# Altium PCB esp8266_hat.PcbDoc
Units mil, origin at the board's own origin, x right, y up, seen from the top; angles counter-clockwise.
Board outline 1110 x 1560 mil, 2 copper layers (Top Layer, Bottom Layer); 11 components, 19 nets, 41 pads, 2 vias.
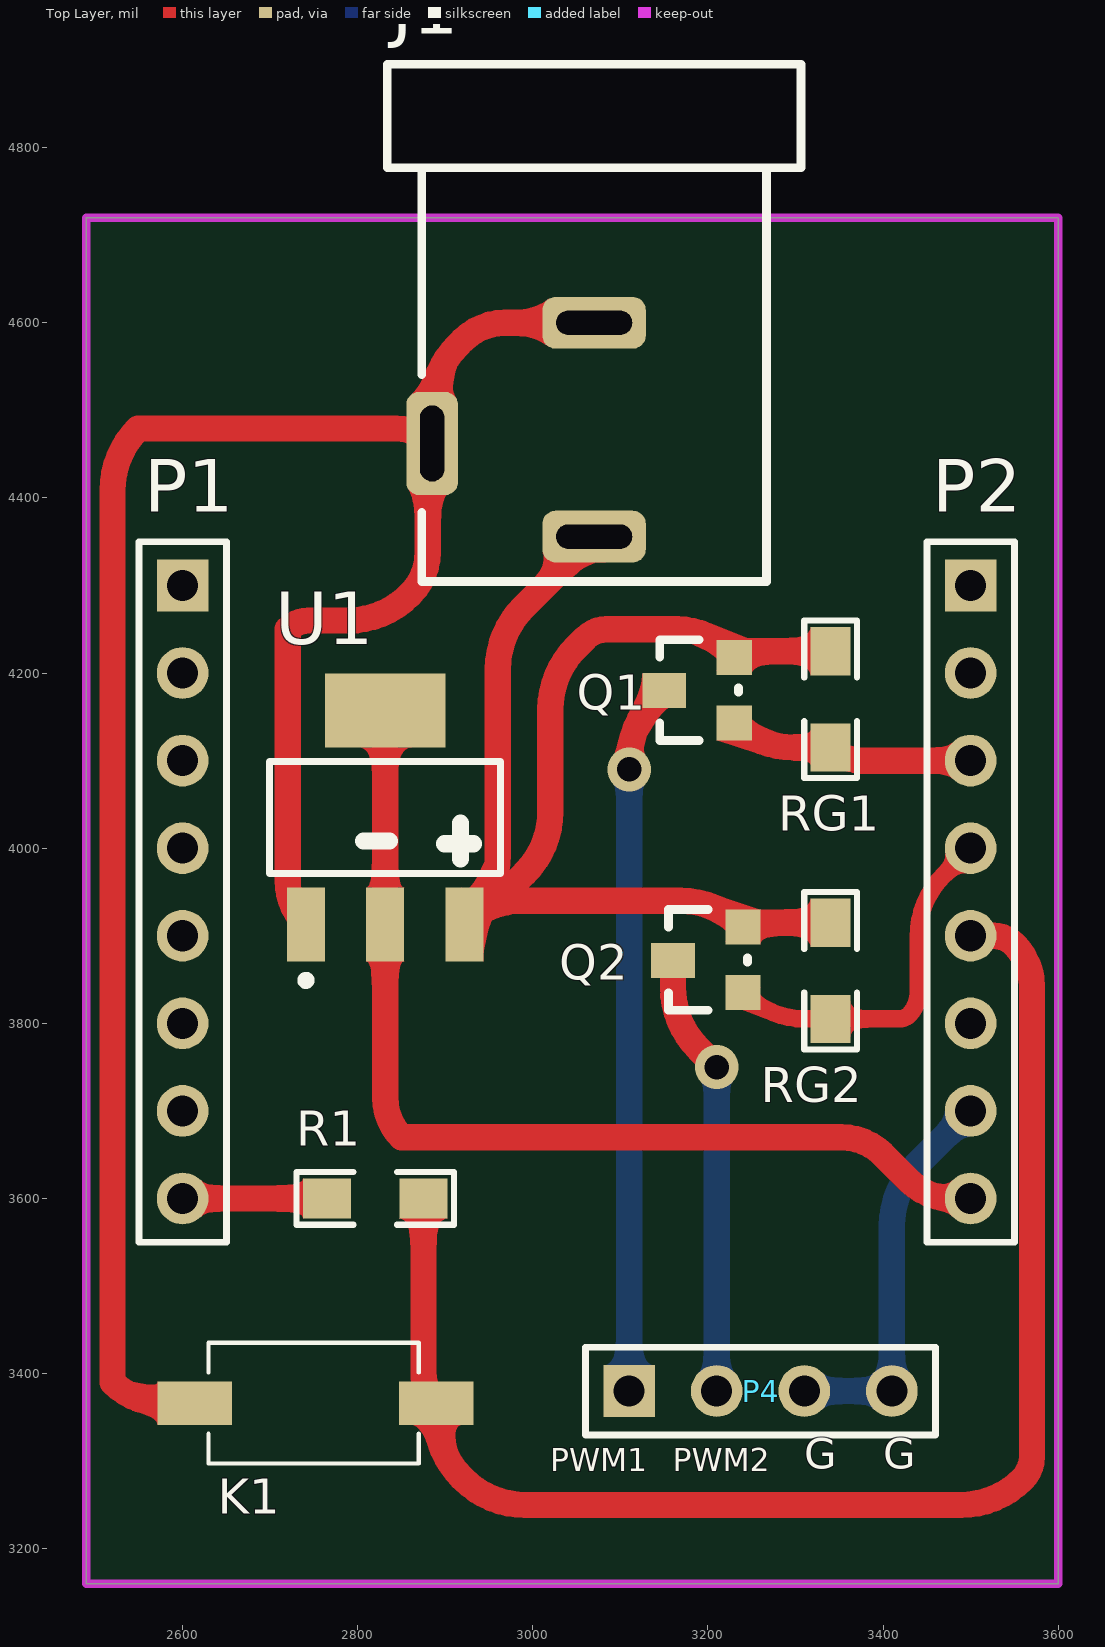
[diagram p0: Top Layer view]
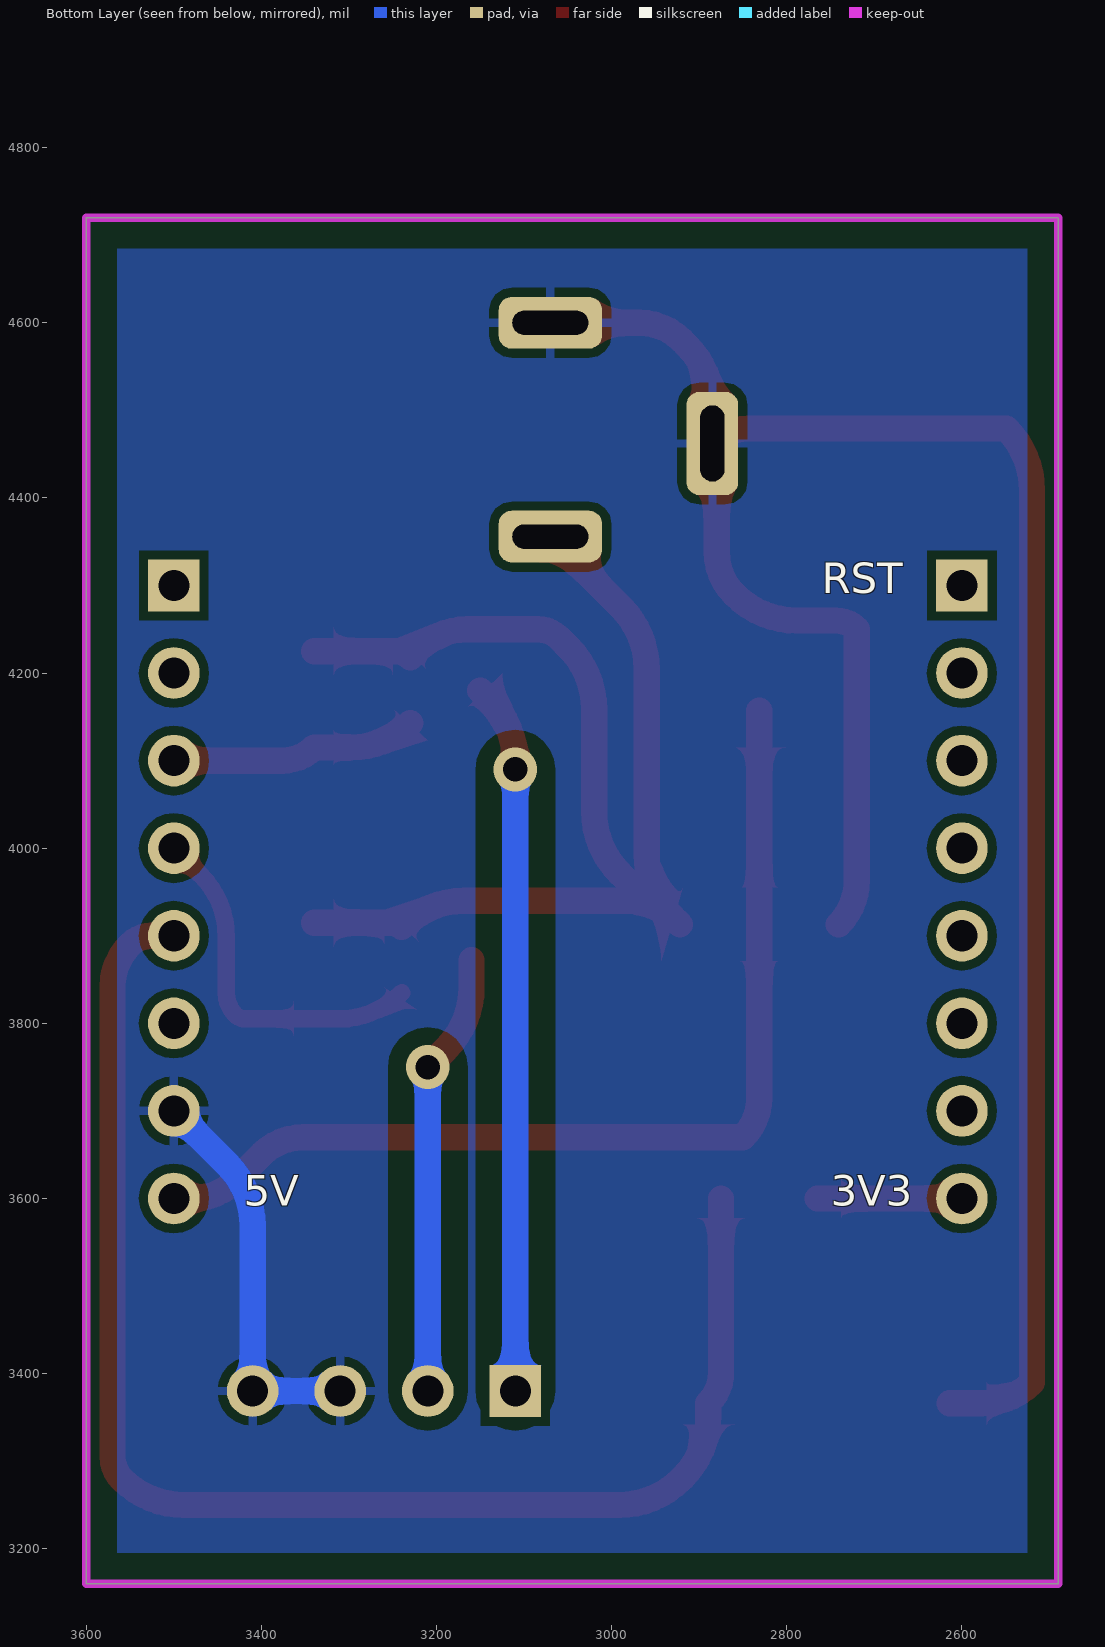
[diagram p1: Bottom Layer view, seen from below]
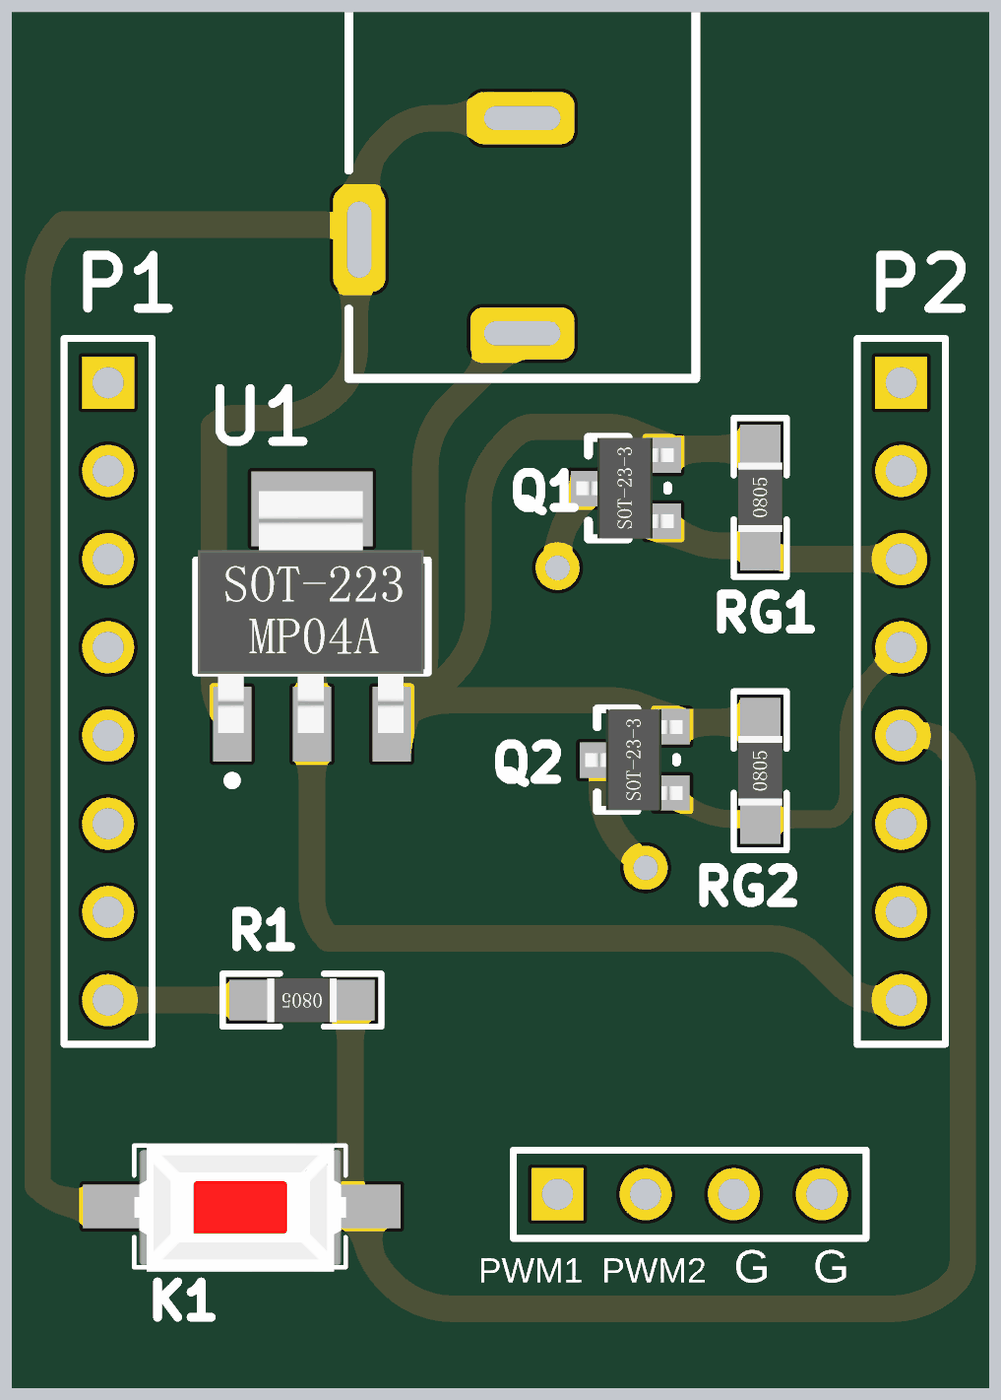
[diagram p2: 3D render of the assembled board from above, using the file's embedded part models]

## Layer stack, top to bottom
Top Solder: solder mask 0.4, Solder Resist, Dk 3.5
Top Layer: signal copper 1.4
Dielectric 1: dielectric 12.6, FR-4, Dk 4.8
Bottom Layer: signal copper 1.4
Bottom Solder: solder mask 0.4, Solder Resist, Dk 3.5

## Board outline
2490,3160 3600,3160 3600,4720 2490,4720

## Design rules (kind name [scope] priority, off if disabled: settings)
Clearance [All] p1: gap=10 except(30: Track-Poly)
PolygonConnect [All] p1: connectstyle=Relief reliefconductorwidth=10 reliefentries=4 polygonreliefangle="90 Angle" airgapwidth=10
RoutingVias [All] p1: holewidth=28 width=50 viastyle="Through Hole" minholewidth=28 minwidth=50 maxholewidth=28 maxwidth=50
SolderMaskExpansion [All] p1: expansion=4
Width [All] p1: maxlimit=100 minlimit=10 preferedwidth=30 minimp=50.000000 maximp=50.000000 favimp=50.000000
30 further rules are at their usual default settings.

## Components (designator, comment, footprint, x,y, rotation, side; value= is the part's Value field where it differs from the comment)
J1 "DC-12V" DC-Jack 3070,4895.28 r270 top
K1 "Button" KEY_2 2760,3350 r180 top
P1 "Header 8" HDR1X8 2600,4300 r270 top
P2 "Header 8" HDR1X8 3500,4300 r270 top
P4 "Header 4" HDR1X4 3110,3380 r0 top
Q1 "AO3401" SOT23 3230.63,4138.12 r90 top
Q2 "AO3401" SOT23 3240.63,3830.12 r90 top
R1 "10K" 0805_r 2820,3600 r180 top
RG1 "200K" 0805_r 3340,4170 r90 top
RG2 "200K" 0805_r 3340,3860 r90 top
U1 "AMS1117-12-5" SOT-223 2820,4040 r0 top

## Footprints (in the part's own frame and the unit in brackets; to place one, negate y for a bottom-side part, rotate by r counter-clockwise, add the part's x,y. Pads: shape width x height; smd on the part's side, far side on the other; paste and mask are expansions set on the pad)
0805_r [mil]
  rect 55.12x46 smd: 1(-55,0) 2(55,0)
  silkscreen extent -90,-30 90,30, body extent -39,-25 39,25, height 22
DC-Jack [mm] "5.5x2.1mm"
  rrect50% 1.5x3 hole 0.7 slot 2.2 at 90 deg unplated: 1(13.7,0) 2(7.5,0)
  rrect50% 3x1.5 hole 0.7 slot 2.2 at 0 deg unplated: 2(11,-4.7)
  silkscreen extent 0,-6 15,6
HDR1X4 [mm] "Connector; Header; 4 Position"
  rect 1.5x1.5 hole 0.9: 1(0,0)
  round 1.5 hole 0.9: 2(2.54,0) 3(5.08,0) 4(7.62,0)
  silkscreen extent -1.27,-1.27 8.89,1.27
HDR1X8 [mm] "Connector; Header; 8 Position"
  rect 1.5x1.5 hole 0.9: 1(0,0)
  round 1.5 hole 0.9: 2(2.54,0) 3(5.08,0) 4(7.62,0) 5(10.16,0) 6(12.7,0) 7(15.24,0) 8(17.78,0)
  silkscreen extent -1.27,-1.27 19.05,1.27
KEY_2 [mil] "贴片"
  rect 85x49.37 smd: 1(-129.57,-16.14) 2(146.02,-16.14)
  silkscreen extent -110,-85 130,53, body extent -110,-88 130,58
SOT23 [mil]
  rect 40x40 smd: 1(4.88,0.63) 3(79.88,0.63)
  rect 40x50 smd: 2(41.88,80.63)
  silkscreen extent -15,-4 100,86, body extent -15,-11 99,99, height 47
SOT-223 [mm] "ASM1117系列"
  rect 1.1x2.15 smd: 1(-2.012,-3.227) 2(0.288,-3.227) 3(2.588,-3.227)
  rect 3.5x2.15 smd: 2(0.288,2.973)
  silkscreen extent -3.06,-4.98 3.64,1.5, body extent -3,-3.48 3.5,3.48, height 1.7

## Part data
J1: library part DC-2.5x2.1-005, "DC-Jack-5.5x2.1mm"
K1: library part KEY_2, "Switch"
P1 P2: "Header, 8-Pin"
P4: "Header, 4-Pin"
Q1 Q2: "PMOS,30V,4A"
R1 RG1 RG2: library part RES, "Resistor"
U1: library part AMS1117, "3.3V电压转换器AMS1117"

## Via types
v1: diameter 50, hole 28, Top Layer to Bottom Layer, 2 vias

## Nets (pads, with @x,y where several pads share a name; then routed paths per layer and width w, separated by ;. In a path a pad name is that pad's centre, name@x,y a point inside that pad or via, vN(x,y) a via of type N, cw(c..) or ccw(c..) an arc to the next point about the centre after c; other vN are vias at no path point)
3V3: P1.8 R1.2 | length 165
  Top Layer w30: P1.8 R1.2
5V: P2.8 U1.2 | length 1165.2
  Top Layer w30: U1.2@2831.34,4157.05 2831.34,3912.95 2831.34,3715.05 ccw(c2895.05,3715.05) 2850,3670 3351.72,3670 cw(c3351.72,3601.72) 3400,3650 3430,3620 ccw(c3478.28,3668.28) 3478.28,3600 P2.8
12V: J1.1 Q1.3 Q2.3 RG1.2 RG2.2 U1.3 | length 1567.3
  Top Layer w30: J1.1 2989.29,4275.19 ccw(c3060,4204.48) 2960,4204.48 2960,3992.48 cw(c2860,3992.48) 2930.71,3921.77 U1.3 cw(c2987.19,3847.66) 2952.69,3933.32 ; RG2.2 3252.07,3915 ccw(c3252.07,3897.93) Q2.3 3239.29,3910.71 ccw(c3168.58,3840) 3168.58,3940 2987.19,3940 ccw(c2987.19,3847.66) 2952.69,3933.32 ; RG1.2 3246.9,4225 ccw(c3246.9,4201.1) Q1.3 3221.45,4226.55 ccw(c3164.84,4169.95) 3164.84,4250 3084.14,4250 ccw(c3084.14,4215.86) 3060,4240 3049.29,4229.29 ccw(c3120,4158.58) 3020,4158.58 3020,4042.04 cw(c2920,4042.04) 2990.71,3971.33 2952.69,3933.32
ADC: P1.2
D0: P1.3
D1: P2.3 Q1.1 RG1.1 | length 281.5
  Top Layer w30: Q1.1 ccw(c3297.6,4210.6) 3297.6,4115 RG1.1 ccw(c3376.21,4151.21) 3376.21,4100 P2.3
D2: P2.4 Q2.1 RG2.1 | length 412.7
  Top Layer w20: Q2.1 3240.71,3834.29 ccw(c3311.42,3905) 3311.42,3805 RG2.1 3417.93,3805 ccw(c3417.93,3822.07) 3430,3810 ccw(c3405.86,3834.14) 3440,3834.14 3440,3898.58 cw(c3540,3898.58) 3469.29,3969.29 P2.4
D3: K1.1 P2.5 R1.1 | length 1659
  Top Layer w30: R1.1 2875,3401.31 ccw(c2924.73,3401.31) K1.1 2889.57,3351.85 ccw(c2989.57,3351.85) 2918.86,3281.14 2920.71,3279.29 ccw(c2991.42,3350) 2991.42,3250 3488.58,3250 ccw(c3488.58,3350) 3559.29,3279.29 ccw(c3533.43,3305.15) 3570,3305.15 3570,3841.72 ccw(c3501.72,3841.72) 3550,3890 ccw(c3525.86,3865.86) 3525.86,3900 P2.5
D4: P2.6
D5: P1.4
D6: P1.5
D7: P1.6
D8: P1.7
GND: J1.2 K1.2 P2.7 P4.3 P4.4 U1.1 | length 2946.3
  Top Layer w30: K1.2 2577.6,3366.14 cw(c2577.6,3447.6) 2520,3390 2520,4408.58 cw(c2620,4408.58) 2549.29,4479.29 2843.71,4479.29 cw(c2843.71,4420.96) J1.2@2884.96,4462.2 ; U1.1 cw(c2790.97,3963.14) 2720,3963.14 2720,4250 cw(c2744.14,4225.86) 2744.14,4260 2788.58,4260 ccw(c2788.58,4360) 2859.29,4289.29 2860,4290 ccw(c2811.72,4338.28) 2880,4338.28 2880,4450.23 cw(c2896.94,4450.23) J1.2@2884.96,4462.2 ; J1.2@3070,4600 2968.28,4600 ccw(c2968.28,4531.72) 2920,4580 2914.25,4574.25 ccw(c2984.96,4503.54) 2884.96,4503.54 J1.2@2884.96,4462.2
  Bottom Layer w30: P4.3 P4.4 3410,3568.58 cw(c3510,3568.58) 3439.29,3639.29 P2.7
NetP4_1: P4.1 Q1.2 | length 812.3
  Top Layer w30: v1(3110,4090) 3110,4098.58 cw(c3210,4098.58) 3139.29,4169.29 Q1.2
  Bottom Layer w30: P4.1 v1(3110,4090)
NetP4_2: P4.2 Q2.2 | length 508.4
  Top Layer w30: Q2.2 3160,3841.42 ccw(c3260,3841.42) 3189.29,3770.71 v1(3210,3750)
  Bottom Layer w30: P4.2 v1(3210,3750)
RST: P1.1
RX: P2.2
TX: P2.1

## Polygon pours and split planes (outlines as drawn)
GND on Bottom Layer "Bottom Layer-GND" (solid, pour order 6): 2490,4720 3600,4720 3600,3160 2490,3160

## Keep-outs
Keep-Out Layer:
  the board outline again, w10

## Silkscreen, mask and mechanical layers (free items; w line width, h text height)
Top Overlay:
  text "PWM1" at 3020,3280 h45
  text "PWM2" at 3160,3280 h45
  text "G" at 3310,3280 h60
  text "G" at 3400,3280 h60
Bottom Overlay:
  text "RST" at 2760,4280 h60
  text "3V3" at 2750,3580 h60
  text "5V" at 3420,3580 h60